# Altium PCB LeftEar.PcbDoc
Units mm, origin at the board's own origin, x right, y up, seen from the top; angles counter-clockwise.
Board outline 72 x 100 mm, 2 copper layers (Top Layer, Bottom Layer); 1 components, 2 nets, 16 pads, 2 vias.
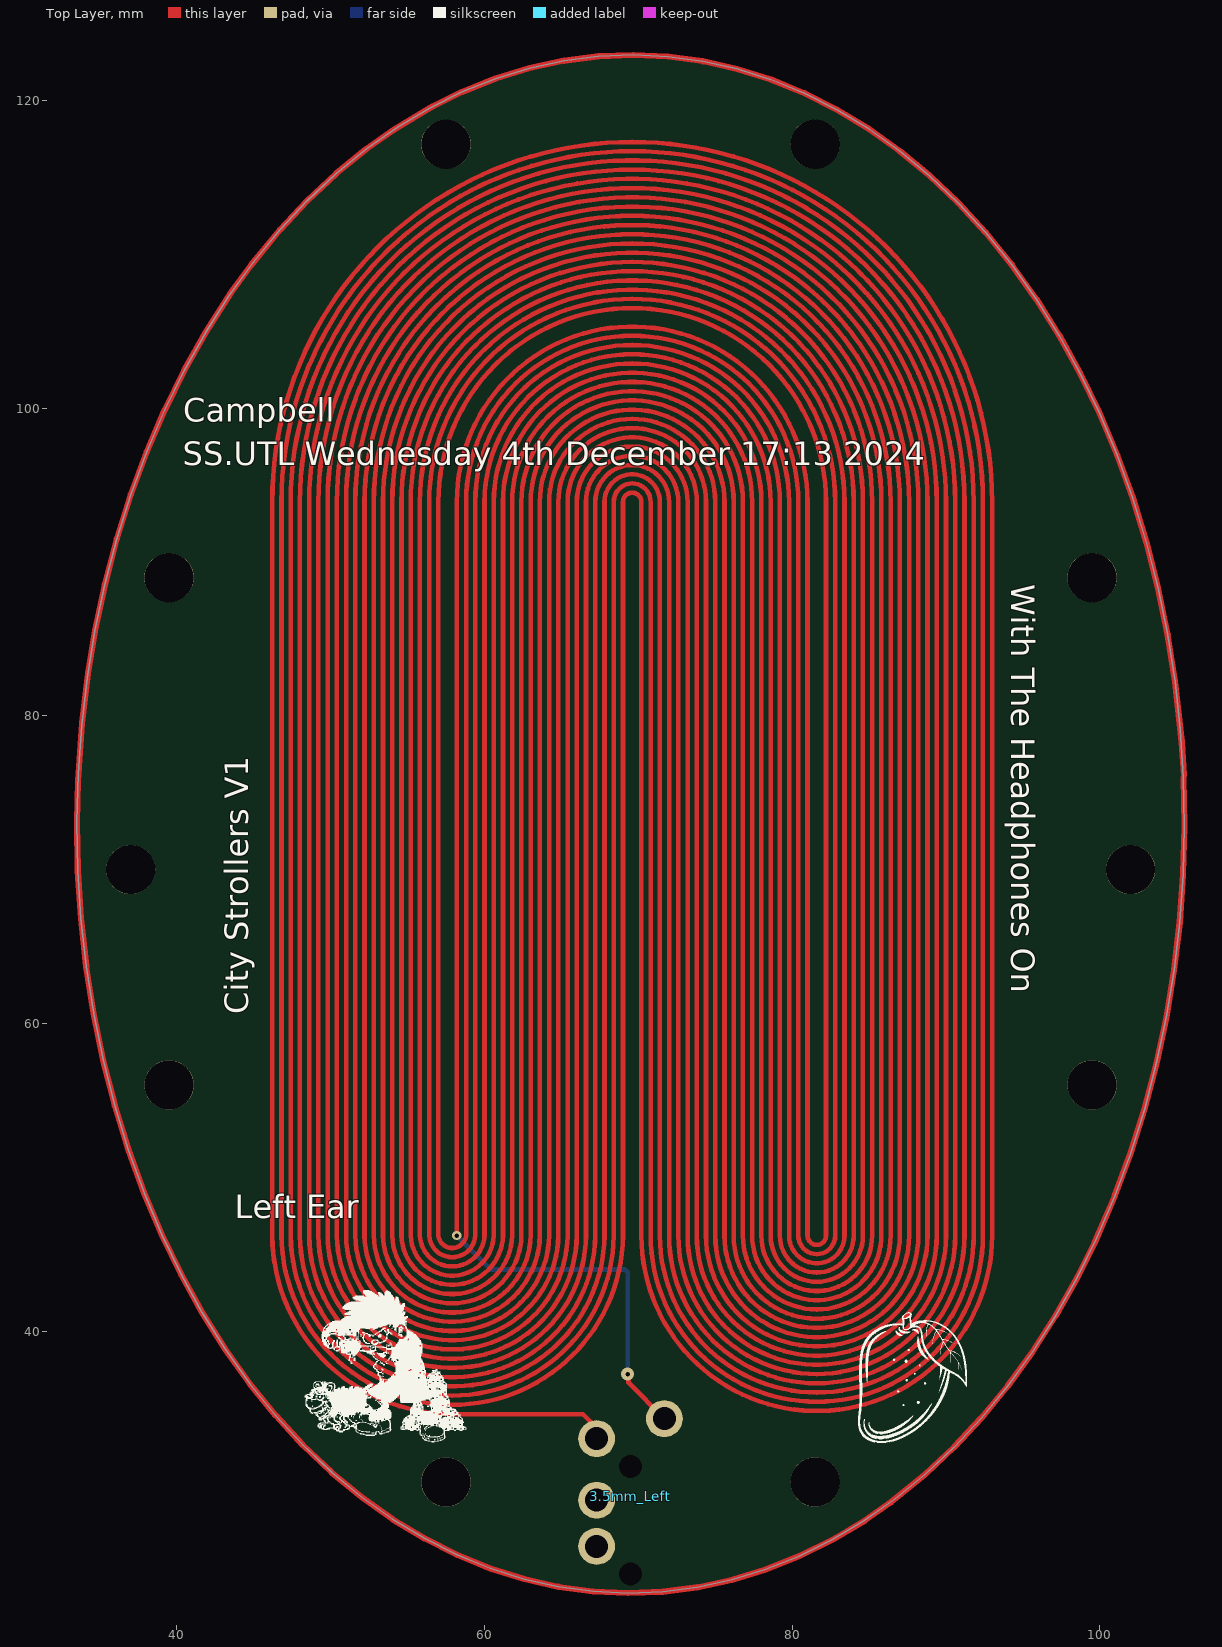
[diagram p0: Top Layer view]
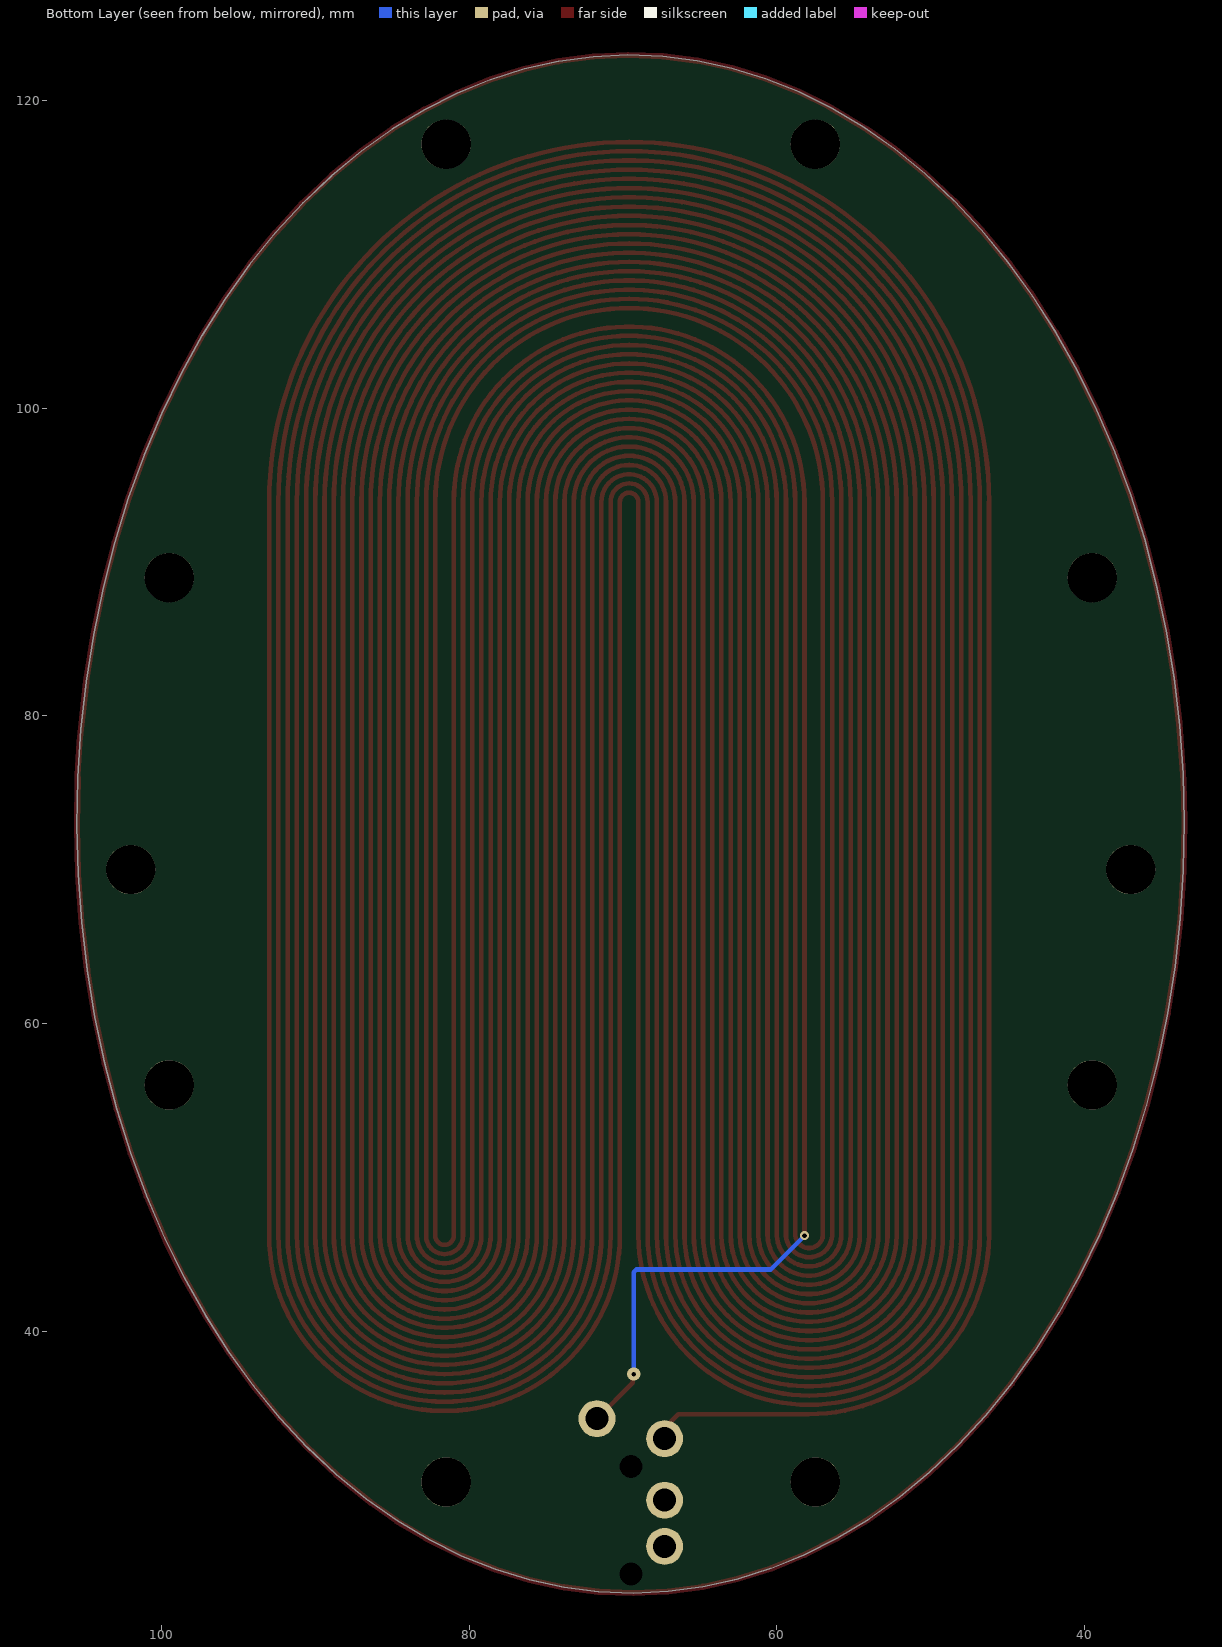
[diagram p1: Bottom Layer view, seen from below]

## Layer stack, top to bottom
Top Solder: solder mask 0.0102, Solder Resist, Dk 3.5
Top Layer: signal copper 0.0356
Dielectric 1: dielectric 0.32, FR-4, Dk 4.8
Bottom Layer: signal copper 0.0356
Bottom Solder: solder mask 0.0102, Solder Resist, Dk 3.5

## Board outline
43.138,38.825 41.65,41.186 40.273,43.673 39.011,46.275 37.869,48.983 36.852,51.785 35.964,54.671 35.208,57.629 34.588,60.648 34.105,63.715 33.762,66.819 33.56,69.946 33.5,73.086 33.582,76.225 33.806,79.352 34.171,82.453 34.675,85.517 35.316,88.531 36.093,91.483 37.001,94.363 38.037,97.158 39.198,99.858 40.478,102.451 41.873,104.928 43.377,107.279 44.984,109.495 46.688,111.566 48.481,113.485 50.358,115.244 52.31,116.836 54.33,118.255 56.41,119.495 58.542,120.552 60.717,121.42 62.926,122.098 65.162,122.581 67.414,122.869 69.675,122.96 71.935,122.853 74.186,122.55 76.418,122.051 78.622,121.358 80.791,120.474 82.915,119.402 84.986,118.148 86.996,116.715 88.937,115.109 90.802,113.337 92.582,111.405 94.271,109.322 95.862,107.096 97.35,104.734 98.727,102.247 99.989,99.645 101.131,96.937 102.148,94.135 103.036,91.249 103.792,88.291 104.412,85.273 104.895,82.205 105.238,79.102 105.44,75.974 105.5,72.834 105.418,69.695 105.194,66.569 104.829,63.467 104.325,60.404 103.684,57.39 102.907,54.437 101.999,51.557 100.963,48.762 99.802,46.063 98.522,43.469 97.127,40.992 95.623,38.641 94.016,36.426 92.312,34.354 90.519,32.436 88.642,30.677 86.69,29.084 84.67,27.665 82.59,26.425 80.458,25.369 78.283,24.5 76.074,23.823 73.838,23.339 71.586,23.051 69.325,22.96 67.065,23.067 64.814,23.371 62.582,23.87 60.378,24.563 58.209,25.447 56.085,26.518 54.014,27.773 52.004,29.206 50.063,30.812 48.198,32.584 46.418,34.515 44.729,36.598

## Design rules (kind name [scope] priority, off if disabled: settings)
Clearance [All] p1: gap=0.3 ignorepadtopadclearanceinfootprint=FALSE
HoleSize [All] p1: absolutevalues=TRUE maxlimit=6 minlimit=0.025 maxpercent=80.000 minpercent=20.000
PolygonConnect [All] p1: connectstyle=Relief reliefconductorwidth=0.254 reliefentries=4 polygonreliefangle="90 Angle" airgapwidth=0.254
RoutingVias [All] p1: holewidth=0.3 width=0.4 viastyle="Through Hole" minholewidth=0.3 minwidth=0.6 maxholewidth=6 maxwidth=12
SolderMaskExpansion [All] p1: expansion=0.102 istentingtop=FALSE
UnRoutedNet [All] p1: checkbadconnections=TRUE
Width [All] p1: maxlimit=10 minlimit=0.3 preferedwidth=0.3 checkconnectedcopper=TRUE
28 further rules are at their usual default settings.

## Components (designator, comment, footprint, x,y, rotation, side; value= is the part's Value field where it differs from the comment)
3.5mm_Left "PJ-320A" PCBComponent_1 72.49,34.8 r180 top

## Footprints (in the part's own frame and the unit in brackets; to place one, negate y for a bottom-side part, rotate by r counter-clockwise, add the part's x,y. Pads: shape width x height; smd on the part's side, far side on the other; paste and mask are expansions set on the pad)
PCBComponent_1 [mm]
  round 0 hole 1.5 unplated: 0(3,10.6) 0(3,3.6)
  round 2.4 hole 1.5: 1(0.8,0.5) 2(5.2,1.8) 3(5.2,5.8) 4(5.2,8.8)

## Part data
3.5mm_Left: "A thru hole 3.5mm TRRS audio jack connector"

## Free pads (board coordinates)
  round 3.2 hole 3.2 unplated: 9(36.995,70) 9(39.49,88.976) 9(39.495,56) 9(57.495,117.153) 9(57.495,30.182) 9(81.495,30.182) 9(81.495,117.153) 9(99.495,88.976) 9(99.5,56) 9(102,70)

## Via types
v1: diameter 0.6, hole 0.3, Top Layer to Bottom Layer, 1 vias
v2: diameter 0.85, hole 0.3, Top Layer to Bottom Layer, 1 vias

## Nets (pads, with @x,y where several pads share a name; then routed paths per layer and width w, separated by ;. In a path a pad name is that pad's centre, name@x,y a point inside that pad or via, vN(x,y) a via of type N, cw(c..) or ccw(c..) an arc to the next point about the centre after c; other vN are vias at no path point)
3.5mm_Left: 3.5mm_Left.1 3.5mm_Left.2 | length 5803
  Top Layer w0.3: v1(58.2,46.2) 58.2,93.9 cw(c69.6,93.9) 81,93.9 81,46.2 ccw(c81.6,46.2) 82.2,46.2 82.2,93.9 ccw(c69.6,93.9) 57,93.9 57,46.2 ccw(c57.9,46.3) 58.8,46.2 58.8,93.9 cw(c69.6,93.9) 80.4,93.9 80.4,46.2 ccw(c81.6,46.2) 82.8,46.2 82.8,93.9 ccw(c69.6,93.9) 56.4,93.9 56.4,46.2 ccw(c57.9,46.3) 59.4,46.2 59.4,93.9 cw(c69.6,93.9) 79.8,93.9 79.8,46.2 ccw(c81.6,46.2) 83.4,46.2 83.4,93.9 ccw(c69.6,93.9) 55.8,93.9 55.8,46.2 ccw(c57.9,46.3) 60,46.2 60,93.9 cw(c69.6,93.9) 79.2,93.9 79.2,46.2 ccw(c81.6,46.2) 84,46.2 84,93.9 ccw(c69.6,93.9) 55.2,93.9 55.2,46.2 ccw(c57.9,46.3) 60.6,46.2 60.6,93.9 cw(c69.6,93.9) 78.6,93.9 78.6,46.2 ccw(c81.6,46.2) 84.6,46.2 84.6,93.9 ccw(c69.6,93.9) 54.6,93.9 54.6,46.2 ccw(c57.9,46.3) 61.2,46.2 61.2,93.9 cw(c69.6,93.9) 78,93.9 78,46.2 ccw(c81.6,46.2) 85.2,46.2 85.2,93.9 ccw(c69.6,93.9) 54,93.9 54,46.2 ccw(c57.9,46.3) 61.8,46.2 61.8,93.9 cw(c69.6,93.9) 77.4,93.9 77.4,46.2 ccw(c81.6,46.2) 85.8,46.2 85.8,93.9 ccw(c69.6,93.9) 53.4,93.9 53.4,46.2 ccw(c57.9,46.3) 62.4,46.2 62.4,93.9 cw(c69.6,93.9) 76.8,93.9 76.8,46.2 ccw(c81.6,46.2) 86.4,46.2 86.4,93.9 ccw(c69.6,93.9) 52.8,93.9 52.8,46.2 ccw(c57.9,46.3) 63,46.2 63,93.9 cw(c69.6,93.9) 76.2,93.9 76.2,46.2 ccw(c81.6,46.2) 87,46.2 87,93.9 ccw(c69.6,93.9) 52.2,93.9 52.2,46.2 ccw(c57.9,46.3) 63.6,46.2 63.6,93.9 cw(c69.6,93.9) 75.6,93.9 75.6,46.2 ccw(c81.6,46.2) 87.6,46.2 87.6,93.9 ccw(c69.6,93.9) 51.6,93.9 51.6,46.2 ccw(c57.9,46.3) 64.2,46.2 64.2,93.9 cw(c69.6,93.9) 75,93.9 75,46.2 ccw(c81.6,46.2) 88.2,46.2 88.2,93.9 ccw(c69.6,93.9) 51,93.9 51,46.2 ccw(c57.9,46.3) 64.8,46.2 64.8,93.9 cw(c69.6,93.9) 74.4,93.9 74.4,46.2 ccw(c81.6,46.2) 88.8,46.2 88.8,93.9 ccw(c69.6,93.9) 50.4,93.9 50.4,46.2 ccw(c57.9,46.3) 65.4,46.2 65.4,93.9 cw(c69.6,93.9) 73.8,93.9 73.8,46.2 ccw(c81.6,46.2) 89.4,46.2 89.4,93.9 ccw(c69.6,93.9) 49.8,93.9 49.8,46.2 ccw(c57.9,46.3) 66,46.2 66,93.9 cw(c69.6,93.9) 73.2,93.9 73.2,46.2 ccw(c81.6,46.2) 90,46.2 90,93.9 ccw(c69.6,93.9) 49.2,93.9 49.2,46.2 ccw(c57.9,46.3) 66.6,46.2 66.6,93.9 cw(c69.6,93.9) 72.6,93.9 72.6,46.2 ccw(c81.6,46.2) 90.6,46.2 90.6,93.9 ccw(c69.6,93.9) 48.6,93.9 48.6,46.2 ccw(c57.9,46.3) 67.2,46.2 67.2,93.9 cw(c69.6,93.9) 72,93.9 72,46.2 ccw(c81.6,46.2) 91.2,46.2 91.2,93.9 ccw(c69.6,93.9) 48,93.9 48,46.2 ccw(c57.9,46.3) 67.8,46.2 67.8,93.9 cw(c69.6,93.9) 71.4,93.9 71.4,46.2 ccw(c81.6,46.2) 91.8,46.2 91.8,93.9 ccw(c69.6,93.9) 47.4,93.9 47.4,46.2 ccw(c57.9,46.3) 68.4,46.2 68.4,93.9 cw(c69.6,93.9) 70.8,93.9 70.8,46.2 ccw(c81.6,46.2) 92.4,46.2 92.4,93.9 ccw(c69.6,93.9) 46.8,93.9 46.8,46.2 ccw(c57.9,46.3) 69,46.2 69,93.9 cw(c69.6,93.9) 70.2,93.9 70.2,46.2 ccw(c81.6,46.2) 93,46.2 93,93.9 ccw(c69.6,93.9) 46.2,93.9 46.2,46.2 ccw(c57.9,46.3) 57.909,34.6 66.404,34.6 67.29,33.714 3.5mm_Left.2 ; v2(69.3,37.2) 69.364,37.136 69.364,36.626 3.5mm_Left.1
  Bottom Layer w0.3: v1(58.2,46.2) 60.4,44 69.124,44 69.3,43.824 v2(69.3,37.2)
3.5mm_Right: 
pads on no net: 3.5mm_Left.0 3.5mm_Left.3 3.5mm_Left.4
copper on no net: | length 271.8
  Top Layer w0.4: 98.522,43.469 97.127,40.992 95.623,38.641 94.016,36.426 92.312,34.354 90.519,32.436 88.642,30.677 86.429,28.872 84.727,27.676 82.823,26.541 80.458,25.369 78.283,24.5 76.074,23.823 73.838,23.339 71.586,23.051 69.325,22.96 67.065,23.067 64.814,23.371 62.582,23.87 60.378,24.563 58.209,25.447 56.085,26.518 54.014,27.773 52.004,29.206 50.063,30.812 48.198,32.584 46.418,34.515 44.729,36.598 43.138,38.825 41.65,41.186 40.273,43.673 39.011,46.275 37.869,48.983 36.852,51.785 35.964,54.671 35.208,57.629 34.588,60.648 34.105,63.715 33.762,66.819 33.56,69.946 33.5,73.086 33.57,75.761 33.839,79.511 34.219,82.746 34.675,85.516 35.316,88.531 36.093,91.483 37.001,94.363 38.037,97.158 39.198,99.858 40.478,102.451 41.873,104.928 43.529,107.517 44.812,109.285 46.688,111.566 48.481,113.485 50.358,115.244 52.31,116.836 54.106,118.097 56.647,119.613 58.542,120.552 60.717,121.42 62.926,122.098 65.162,122.581 67.414,122.869 69.675,122.96 71.935,122.853 74.186,122.55 76.418,122.051 78.622,121.358 80.791,120.474 82.915,119.402 84.986,118.148 86.996,116.715 88.937,115.109 90.802,113.337 92.582,111.405 94.271,109.322 95.863,107.095 97.35,104.734 98.727,102.247 99.989,99.645 101.131,96.937 102.148,94.135 103.036,91.249 103.792,88.291 104.412,85.273 104.895,82.205 105.327,78.295 105.468,76.108 ; 98.547,43.478 99.658,45.728 100.963,48.762 101.999,51.557 102.907,54.437 103.684,57.39 104.325,60.404 104.829,63.467 105.194,66.569 105.418,69.695 105.5,72.834 105.44,75.974

## Silkscreen, mask and mechanical layers (free items; w line width, h text height)
Top Overlay:
  drawing of 136 lines, arcs and shapes, not listed
  text "Campbell" at 40.402,99.105 h1.52
  text "SS.UTL Wednesday 4th December 17:13 2024" at 40.38,96.271 h1.52
  text "With The Headphones On" at 94.234,88.56 h1.52 r270
  text "City Strollers V1" at 44.638,60.584 h1.52 r90
  text "Left Ear" at 43.774,47.329 h1.52
Mechanical 1:
  circle w0.013: c39.495,88.976 r1.6
  circle w0.013: c99.495,88.976 r1.6
  circle w0.013: c101.995,70.011 r1.6
  circle w0.013: c81.495,117.113 r1.6
  circle w0.013: c57.495,117.113 r1.6
  circle w0.013: c99.495,55.991 r1.6
  circle w0.013: c81.495,30.143 r1.6
  circle w0.013: c39.495,55.991 r1.6
  circle w0.013: c36.995,70.011 r1.6
  circle w0.013: c57.495,30.143 r1.6
  lines w0.013: 82,46 82,94 ; 45.995,46.01 ccw(c57.495,46.01) 57.495,34.51 ccw(c57.495,46.01) 68.995,46.01 ; 45.995,46.01 68.995,46.01 ; 45.995,46.01 45.995,94.01 ; 45.995,46.01 56.995,46.01 56.995,94.01 45.995,94.01 ; 45.995,94.01 cw(c69.245,94.01) 69.245,117.26 69.745,117.26 cw(c69.745,94.01) 92.995,94.01 ; 45.995,94.01 92.995,94.01 ; 68.995,46.01 57.995,46.01 57.995,94.01 68.995,94.01 68.995,46.01 ; 69.995,46.01 ccw(c81.495,46.01) 81.495,34.51 ccw(c81.495,46.01) 92.995,46.01 ; 69.995,46.01 92.995,46.01 ; 69.995,46.01 69.995,94.01 80.995,94.01 80.995,46.01 69.995,46.01 ; 92.995,46.01 81.995,46.01 81.995,94.01 92.995,94.01 ; 92.995,46.01 92.995,94.01 ; 42.995,46.01 42.995,94.01 95.995,94.01 95.995,46.01 42.995,46.01 ; 66.9,22.898 66.9,35.098 73.1,35.098 73.1,22.898 66.9,22.898